# Altium PCB usbToTTLByPL2303_6.PcbDoc
Units mil, origin at the board's own origin, x right, y up, seen from the top; angles counter-clockwise.
Board outline 2962.74 x 1584.83 mil, 2 copper layers (Top Layer, Bottom Layer); 12 components, 7 nets, 34 pads, 0 vias.
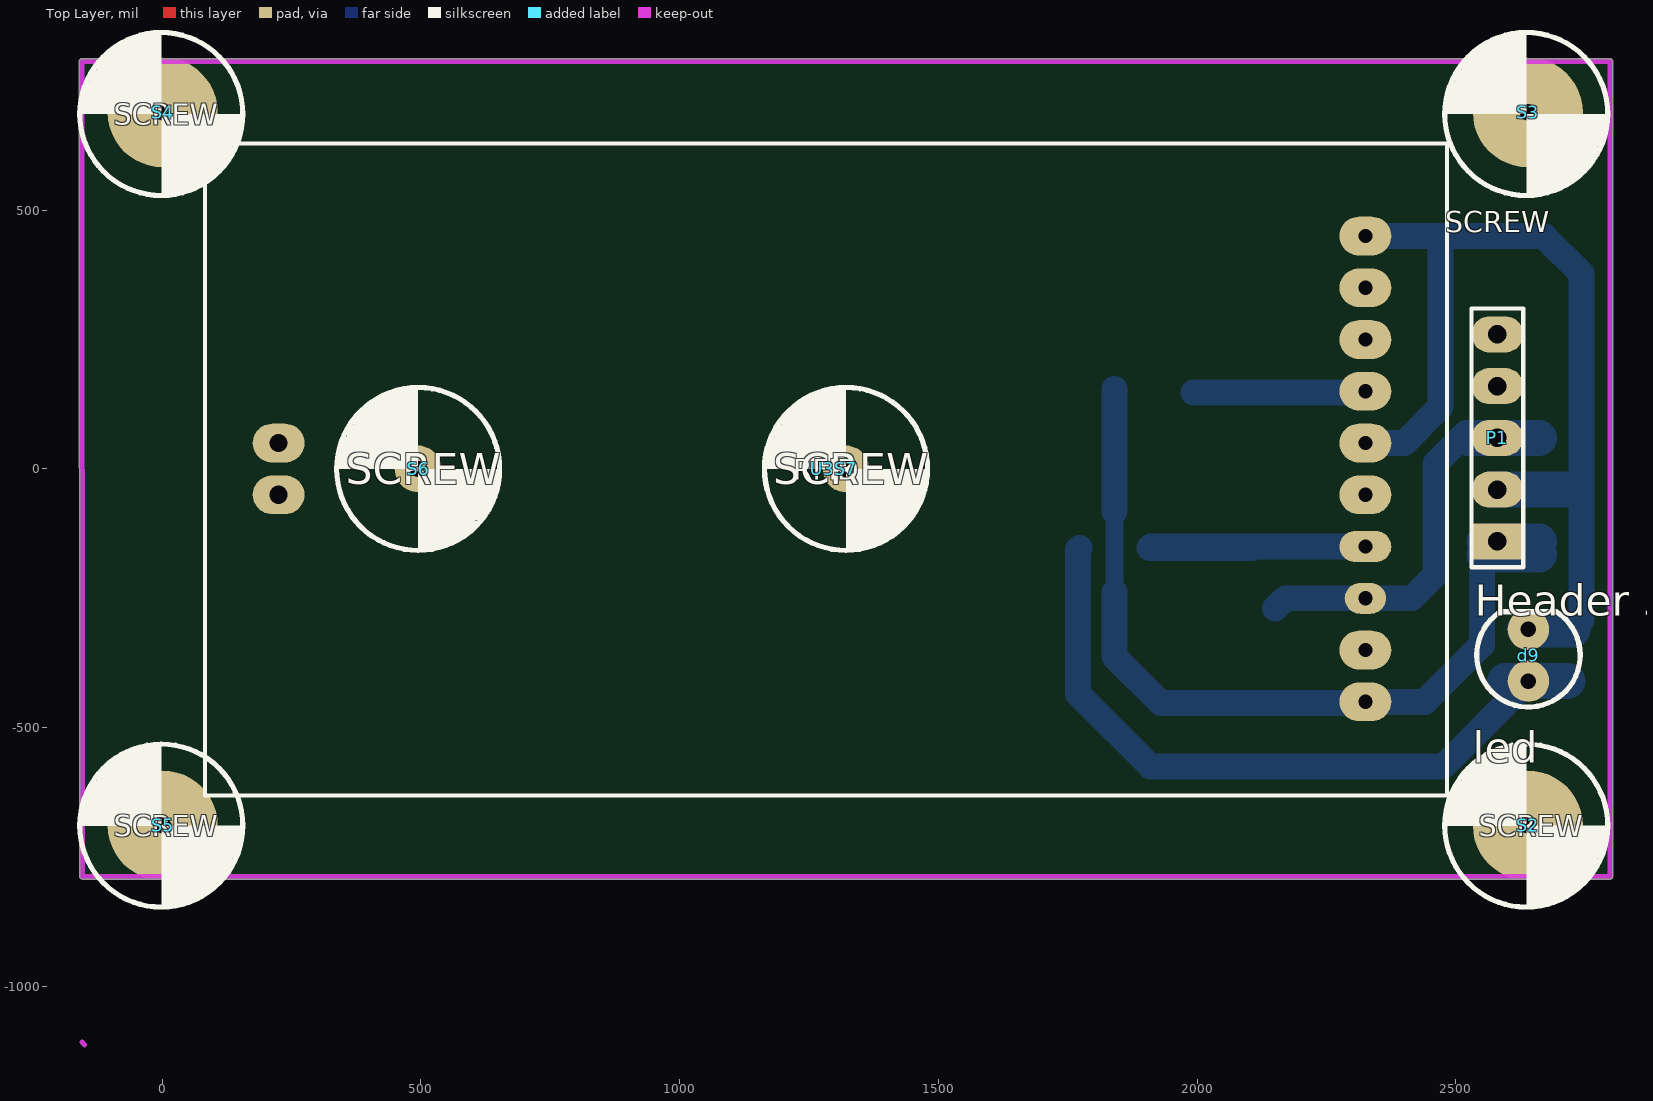
[diagram p0: Top Layer view]
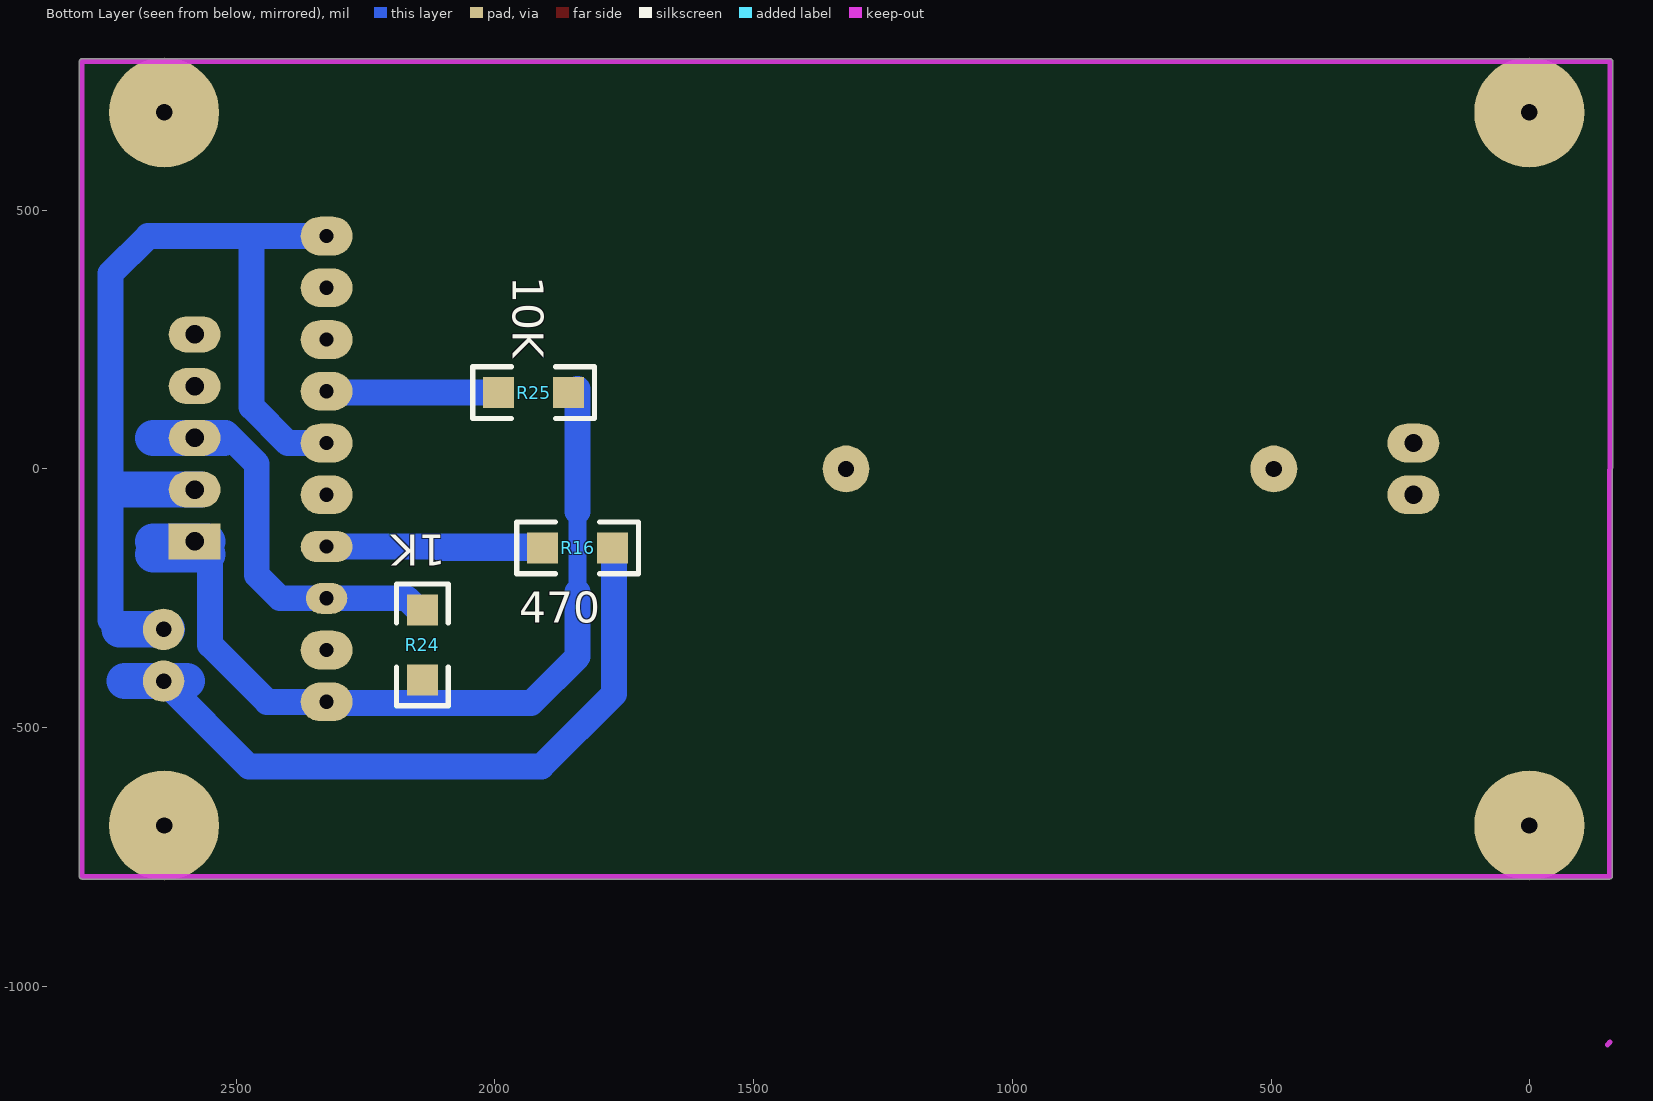
[diagram p1: Bottom Layer view, seen from below]
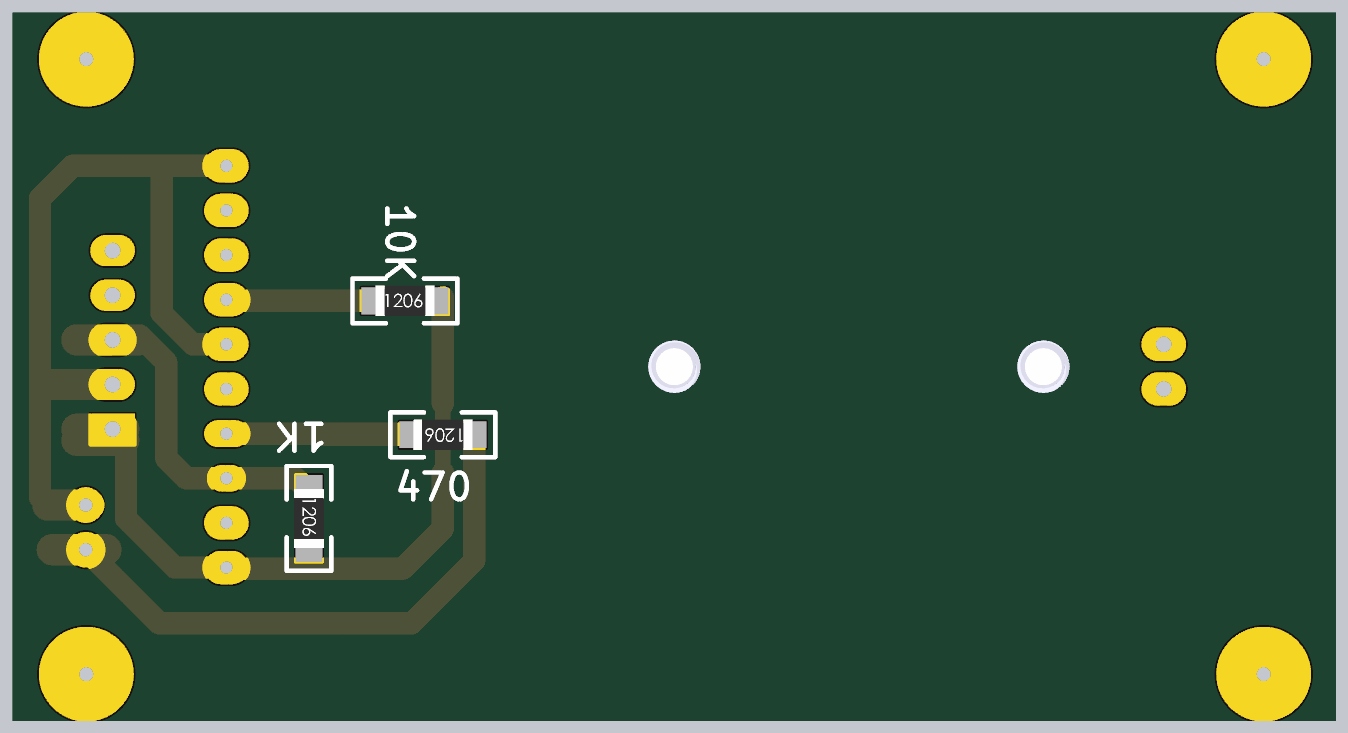
[diagram p2: 3D render of the assembled board from below, using the file's embedded part models]

## Layer stack, top to bottom
Top Layer: signal copper 1.4
Dielectric: dielectric 12.6, FR-4, Dk 4.8
Bottom Layer: signal copper 1.4

## Board outline
-159.32,-787.4 -159.32,-787.34 -160.01,787.32 cw(c-155,787.4) -155,792.42 2797.71,792.42 cw(c2797.71,787.4) 2802.73,787.4 2802.73,-787.4 cw(c2797.71,-787.4) 2797.71,-792.42 -154.3,-792.42 cw(c-154.3,-787.4)

## Design rules (kind name [scope] priority, off if disabled: settings)
Clearance [All] p1: gap=20
ComponentClearance [All] p1 off: gap=10 collisioncheckmode=3 verticalgap=10 showdistances=FALSE
HoleSize [All] p1: absolutevalues=TRUE maxlimit=500 minlimit=0 maxpercent=80.000 minpercent=20.000
PolygonConnect [All] p1: connectstyle=Relief reliefconductorwidth=10 reliefentries=4 polygonreliefangle="90 Angle"
RoutingVias [All] p1: holewidth=28 width=50 viastyle="Through Hole" minholewidth=28 minwidth=50 maxholewidth=28 maxwidth=50
SolderMaskExpansion [All] p1: expansion=4
TestPointUsage [All] p1: valid=0 allowmultiple=FALSE
Testpoint [All] p1: side=15 testpointundercomponent=TRUE minsize=40 maxsize=100 preferedsize=60 minholesize=0 maxholesize=40 preferedholesize=32 testpointgrid=1 style=1023 order=0123456789
Width [All] p1: maxlimit=500 minlimit=10 preferedwidth=10 bottomlayer_prefwidth=50 minimp=50.000000 maximp=50.000000 favimp=50.000000
17 further rules are at their usual default settings.

## Classes and differential pairs
component class usbToTTLByPL2303_4: d9 P1 R16 R24 R25 U3

## Components (designator, comment, footprint, x,y, rotation, side; value= is the part's Value field where it differs from the comment)
d9 "led" LED5 2640,-360 r270 top
P1 "Header 5" HDR1X5 2580,-140 r90 top
R16 "470" 1206_smd 1840,-152.6 r0 bottom
R24 "1K" 1206_smd 2140,-340 r270 bottom
R25 "10K" 1206_smd 1925,147.4 r180 bottom
S2 "SCREW" screw#1 2635.8,-689.17 r270 top
S3 "SCREW" screw#2 2635.8,685.83 r270 top
S4 "SCREW" screw#3 -1.7,685.83 r270 top
S5 "SCREW" screw#4 -1.7,-689.17 r270 top
S6 "SCREW" screw#5 494.56,0 r270 top locked
S7 "SCREW" screw#5 1321.33,0 r270 top locked
U3 "RFID" RF 2325,-450 r180 top

## Footprints (in the part's own frame and the unit in brackets; to place one, negate y for a bottom-side part, rotate by r counter-clockwise, add the part's x,y. Pads: shape width x height; smd on the part's side, far side on the other; paste and mask are expansions set on the pad)
1206_smd [mil]
  rect 60x60 smd: 1(-67.5,0) 2(67.5,0)
  round 0 on Mech3: ""(0,0)
  silkscreen extent -117,-50 118,50, body extent -66,-34 66,34, height 33
HDR1X5 [mil] "Connector; Header; 5 Position"
  rect 70x100 hole 35.43: 1(0,0)
  oval 70x100 hole 35.43: 2(100,0) 3(200,0) 4(300,0) 5(400,0)
  silkscreen extent -50,-50 450,50
LED5 [mil]
  round 80 hole 30: A(50,0) K(-50,0)
  silkscreen extent -84,-100 100,100, body extent -117,-118 118,118, height 280
RF [mm]
  oval 2.54x1.905 hole 0.7: 1(0,0) 2(0,-2.54) 5(0,-10.16) 6(0,-12.7) 7(0,-15.24) 8(0,-17.78) 9(0,-20.32) 10(0,-22.86)
  oval 2.032x1.524 hole 0.7: 3(0,-5.08)
  oval 2.54x1.524 hole 0.7: 4(0,-7.62)
  oval 2.54x1.905 hole 0.889: 11(53.34,-10.16) 12(53.34,-12.7)
  silkscreen extent -4,-27.41 56.96,4.59, body extent -4.1,-27.51 57.06,4.69, height 12
screw#1 [mm]
  round 5.4 hole 0.8: 0(-0.005,0.078)
  silkscreen extent -4,-4 4,4
screw#2 [mm]
  round 5.4 hole 0.8: 0(-0.08,0.078)
  silkscreen extent -4,-4 4,4
screw#3 [mm]
  round 5.4 hole 0.8: 0(-0.08,0.07)
  silkscreen extent -4,-4 4,4
screw#4 [mm]
  round 5.4 hole 0.8: 0(-0.005,0.07)
  silkscreen extent -4,-4 4,4
screw#5 [mm]
  round 2.3 hole 0.8: 0(0,0)
  silkscreen extent -4,-4 4,4, body extent -2.8,-2.8 2.8,2.8, height 2.38

## Part data
P1: "Header, 5-Pin"
R16 R24 R25: library part Res1, "Resistor"
U3: library part "RFID module"

## Nets (pads, with @x,y where several pads share a name; then routed paths per layer and width w, separated by ;. In a path a pad name is that pad's centre, name@x,y a point inside that pad or via, vN(x,y) a via of type N, cw(c..) or ccw(c..) an arc to the next point about the centre after c; other vN are vias at no path point)
GND: d9.K P1.2 U3.6 U3.10 | length 1955.3
  Bottom Layer w50: U3.6 2400,50 2470,120 2470,440 ; U3.10 2670,450 2742.71,377.29 2742.71,-182.6 ; d9.K d9.K@2662.71,-310 ; 2725,-310 2742.71,-292.29 2742.71,-182.6 ; 2742.71,-230 2742.71,-182.6
  Bottom Layer w70: P1.2@2568.14,-40 2620,-40 2725,-40 ; d9.K@2633.14,-310 d9.K 2725,-310
JUMPER: R25.1 U3.7 | length 333.6
  Bottom Layer w50: R25.1 2322.4,147.4 U3.7
Netd9_A: d9.A R16.1 | length 1399.8
  Bottom Layer w50: R16.1 1770,-155.1 1770,-435 1910,-575 2475,-575 d9.A
  Bottom Layer w70: 2595,-410 2715,-410
NetR16_2: R16.2 U3.4 | length 613.6
  Bottom Layer w50: R16.2 1910.1,-150 U3.4 ; R16.2@1910,-152.6 2105,-152.6
RX: P1.3 R24.1 U3.3 | length 838.6
  Bottom Layer w50: R24.1@2150,-270 2170,-250 U3.3 2415,-250 2460,-205 2460,10 2520,70 ; P1.3@2555,60 P1.3 P1.3@2620,60
  Bottom Layer w70: 2523.14,60 P1.3 2620,60 2660,60
TX: P1.4
VCC: P1.1 R24.2 R25.2 U3.1 | length 1780.8
  Bottom Layer w35: 1840,-237.6 1840,-82.6
  Bottom Layer w50: 1840,-237.6 1840,-362.6 1930,-452.6 2320,-452.6 U3.1@2325,-447.6 ; 1840,-82.6 R25.2@1840,155 ; U3.1 2440,-450 2550,-340 2550,-160 2570,-140 P1.1@2620,-140
  Bottom Layer w70: P1.1@2555,-165 2660,-165 ; P1.1@2555,-140 2660,-140
pads on no net: P1.5 R16. R24. R25. S2.0 S3.0 S4.0 S5.0 S6.0 S7.0 U3.2 U3.5 U3.8 U3.9 U3.11 U3.12

## Keep-outs
Keep-Out Layer:
  lines w10: -155,-1107.6 -150,-1112.6 ; -155,787.4 2797.71,787.4 2797.71,-787.4 -154.3,-787.4 -155,787.4

## Silkscreen, mask and mechanical layers (free items; w line width, h text height)
Mechanical 3:
  circle w10: c2148.11,0 r45.83